# EAGLE board tvbgone-adj (EAGLE 5.10)
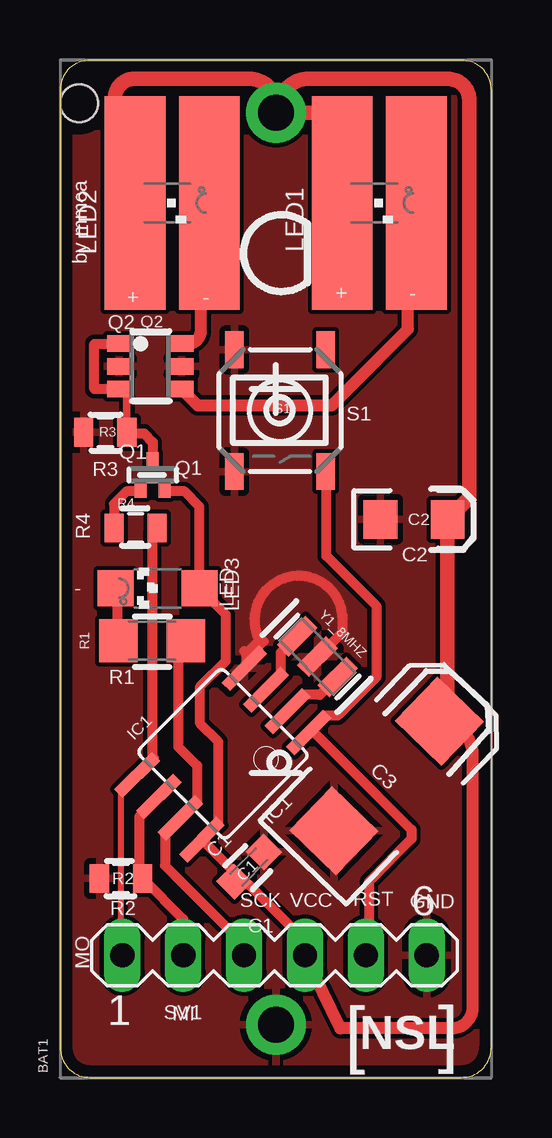
[diagram p0: board, top side]
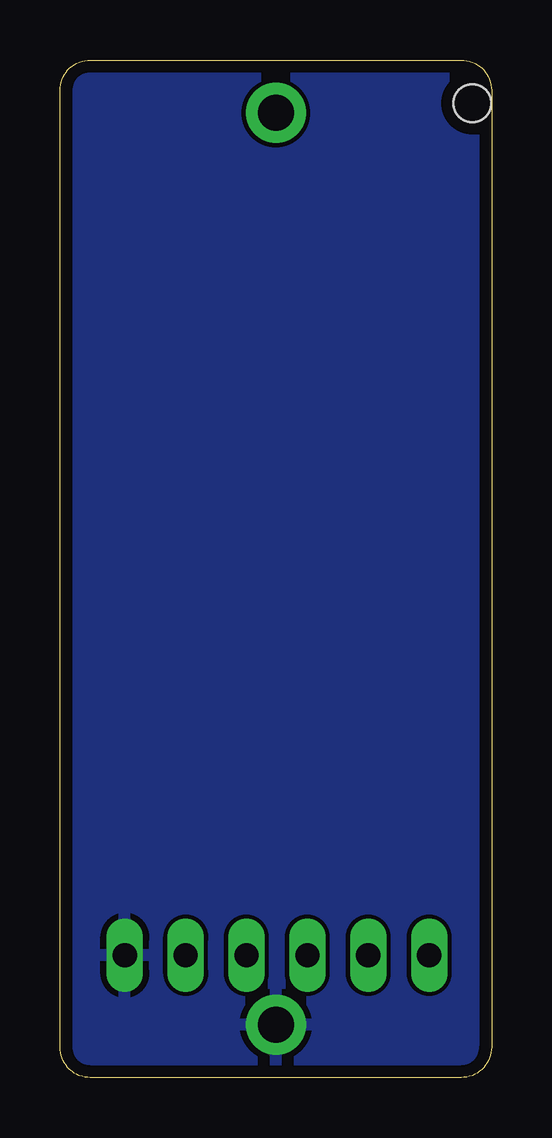
[diagram p1: board, bottom side, seen from below]

Size 18 x 42.4 mm. Coordinates in mm from the lower left corner, seen from the top.
Outline: 16.73,0 arc90 18,1.27 18,41.13 arc90 16.73,42.4 1.27,42.4 arc90 0,41.13 0,1.27 arc90 1.27,0 16.73,0
Copper layers (1*16): Top 0.0356mm / dielectric 1.5011mm / Bottom 0.0356mm
Design rules "SilverCircuits": minimum track width 7mil, minimum drill 14mil, track to track 7mil, track to pad 7mil, pad to pad 7mil, via to via 7mil, smd to smd 0mil, copper to edge 20mil, drill to drill 8mil, minimum pad ring 10mil, minimum via ring 8mil, stop-mask expansion 4mil, vias tented up to drill 0mil, thermal gap 10mil

## Footprints (pad centres in the part's own frame; a part is rotated, then mirrored left to right if it is on the bottom)
BATTERY_CR123A = drill 1.5 pad 2.5 round: + 19,0; - -19,0 | hole 1.575: 19.4,8.2
C0603K = smd 1.05 x 1.08: 1 -0.875,0; 2 0.875,0
EIA3216 = smd 1.4 x 1.6: A 1.4,0; C -1.4,0
EIA7343 = smd 2.55 x 2.7: A 3.17,0; C -3.17,0
SOIC8 = smd 0.5 x 2.2: 1 -1.905,-3.154; 2 -0.645,-3.154; 3 0.625,-3.154; 4 1.895,-3.154; 5 1.905,3.154; 6 0.635,3.154; 7 -0.635,3.154; 8 -1.905,3.154
SIDE_IR_NSL@1 = smd 2.54 x 8.89: A -1.547,0; C 1.547,0
CHIPLED_1206 = smd 1.5 x 1.5: A 0,-1.75; C 0,1.75
SOT416 = smd 0.6 x 0.5: 1 -0.65,0; 2 0.65,-0.5; 3 0.65,0.5
SSOT6 = smd 0.69 x 0.99: 1 -0.95,-1.3; 2 0,-1.3; 3 0.95,-1.3; 4 0.95,1.3; 5 0,1.3; 6 -0.95,1.3
1206 = smd 1.6 x 1.8: 1 -1.4,0; 2 1.4,0
0805 = smd 0.8 x 1.2: 1 -0.9,0; 2 0.9,0
TACTILE_SWITCH_SMD = smd 1.524 x 0.762: 1 -2.54,1.905; 2 2.54,1.905; 3 -2.54,-1.905; 4 2.54,-1.905
CON-LSTB_MA06-1 = drill 1.016 long: 1 -6.35,0; 2 -3.81,0; 3 -1.27,0; 4 1.27,0; 5 3.81,0; 6 6.35,0
RESONATOR-SMD = smd 0.7 x 1.7: 1 -1.2,0; 2 0,0; 3 1.2,0

## Placement (x,y rotation side)
BAT1  CR123A  [BATTERY_CR123A]  9,21.2 90 top
C1  0.1uF  [C0603K]  7.88,8.78 45 top
C2  10uF  [EIA3216]  14.77,23.26 0 top
C3  100uF  [EIA7343]  13.62,12.56 46 top
IC1  ATTINY85V-10S  [SOIC8]  6.8,13.49 135 top
LED1  [SIDE_IR_NSL@1]  13.32,36.44 0 top
LED2  [SIDE_IR_NSL@1]  4.68,36.44 0 top
LED3  [CHIPLED_1206]  4.07,20.39 90 top
Q1  BC857AT115  [SOT416]  3.87,25.11 270 top
Q2  FMB2222A  [SSOT6]  3.77,29.63 270 top
R1  1.5K  [1206]  3.84,18.2 180 top
R2  10K  [0805]  2.55,8.3 0 top
R3  10K  [0805]  1.89,26.89 180 top
R4  1K  [0805]  3.16,22.9 0 top
S1  SWITCH  [TACTILE_SWITCH_SMD]  9.18,27.79 270 top
SV1  [CON-LSTB_MA06-1]  8.95,5.1 0 top
Y1_8MHZ  RESONATOR  [RESONATOR-SMD]  10.74,17.54 315 top

## Library data of the parts
BAT1 = tvbgone-adj
C1 = rcl-ez
C2 C3 R1-R4 S1 Y1_8MHZ = SparkFun
IC1 = avr
LED1 LED2 = tvbgone3
LED3 = minimidi
Q1 = zetex
Q2 = fairchild-semic
SV1 = NSL

## Nets
GND: BAT1.- C1.2 C2.C C3.C IC1.4 Q2.2 Q2.5 R2.1 R3.2 S1.3 S1.4 SV1.6 Y1_8MHZ.2
MISO: IC1.6 R2.2 SV1.2
MOSI: IC1.5 R4.2 SV1.1
N$1: IC1.3 Y1_8MHZ.1
N$2: IC1.2 Y1_8MHZ.3
N$3: LED3.C R1.2
N$4: LED1.C Q2.4
N$5: LED2.C Q2.6
N$6: Q1.2 R4.1
N$7: Q1.1 Q2.1 Q2.3 R3.1
RST: IC1.1 S1.2 SV1.5
SCK: IC1.7 R1.1 SV1.3
VCC: BAT1.+ C1.1 C2.A C3.A IC1.8 LED1.A LED2.A LED3.A Q1.3 SV1.4

## Tracks (layer width: path | path; a pad name or v marks a point on that pad's centre or on a via)
GND
  Top 0.254: IC1.4 7.69,17.58 7.85,17.58 7.86,17.59 | Y1_8MHZ.2 10.75,17.54
  Top 0.305: 7.86,17.59 7.86,17.29 | 7.86,17.77 7.68,17.77 | 8.31,18.23 8.47,18.23 8.49,18.2 8.49,18.18
  Top 0.406: 7.68,17.77 7.86,17.59 | 7.86,17.77 8.31,18.23 arc-207 11.79,19.07 11.79,18.58 10.75,17.54 | 8.49,18.18 8.19,17.87
  pour Top: -0.04,42.28 18.22,42.28 18.22,0.12 -0.04,-0.09
  pour Bottom: -0.73,43.12 19.08,43.12 18.98,-0.44 -0.4,-0.77
MISO
  Top 0.406: SV1.2 5.14,6.61 R2.2 3.31,8.43 3.31,10.89 3.39,10.96 3.42,10.96 IC1.6
MOSI
  Top 0.254: SV1.1 2.6,6.52 2.52,6.6 2.52,11.91 IC1.5
  Top 0.406: IC1.5 3.92,13.33 arc-90 3.84,13.4 3.84,22.69 R4.2
N$1
  Top 0.406: IC1.3 9.2,16.78 9.2,17.7 Y1_8MHZ.1
N$2
  Top 0.406: IC1.2 9.49,15.31 10.12,15.94 10.84,15.94 Y1_8MHZ.3
N$3
  Top 0.305: LED3.C 2.39,20.32
  Top 0.406: 2.39,20.32 2.39,18.2 R1.2
N$4
  Top 0.508: 14.51,36.09 14.51,31.18 11.34,28.01 5.74,28.01 Q2.4
  Top 0.61: 14.51,36.09 LED1.C
N$5
  Top 0.406: 5.34,35.55 5.71,35.92 LED2.C | Q2.6 5.34,30.58
  Top 0.508: 5.34,30.58 arc90 5.88,31.12 5.88,32.3
  Top 0.61: 5.88,32.3 arc-90 5.71,32.47 5.71,35.92
N$6
  Top 0.406: R4.1 2.26,23.91 2.78,24.43 3.33,24.43 Q1.2
N$7
  Top 0.305: R3.1 2.79,28.68 Q2.3
  Top 0.406: Q2.1 1.43,30.57 1.43,28.68 Q2.3 | Q1.1 3.87,26.48 3.51,26.84 2.84,26.84 R3.1
RST
  Top 0.254: IC1.1 11.08,15.08
  Top 0.406: S1.2 11.11,25.22 11.11,21.73 13.19,19.65 13.19,16.68 11.59,15.08 11.08,15.08 11.03,15.08 10.6,14.65 10.6,14.39 14.66,10.33 14.66,9.95 12.89,8.17 12.89,5.22 SV1.5
SCK
  Top 0.254: 5.04,10.81 IC1.7 | R1.1 4.94,17.9
  Top 0.305: IC1.7 4.38,10.12
  Top 0.406: SV1.3 7.68,5.53 4.38,8.83 4.38,10.12 | 5.04,10.81 5.72,11.5 5.72,13 4.94,13.78 4.94,17.9
VCC
  Top 0.254: IC1.8 5.95,9.92
  Top 0.406: BAT1.+ 9,40.45 9.05,40.45 | 2.29,39.23 arc-90 3.14,38.39 LED2.A | 5.95,9.92 6.61,10.58 6.61,13.99 5.85,14.75 5.85,16.3 6.92,17.36 6.92,19.29 LED3.A 5.82,23.79 5.19,24.43 4.41,24.43 Q1.3 | 10.22,5.36 10.22,5.71 7.88,8.04 7.39,8.04 C1.1 7.26,8.57 IC1.8
  Top 0.508: 10.22,5.36 SV1.4 11.69,2.05 16.34,2.05 arc90 17.2,2.91 17.2,13.47 arc90 C3.A
  Top 0.61: 9.05,40.45 arc90 7.88,41.62 3.11,41.62 arc90 2.29,40.81 2.29,39.23 | LED1.A 11.77,40.25 11.77,40.2 BAT1.+ arc-90 10.42,41.62 16.16,41.62 arc-90 17.08,40.71 17.08,24.17 C2.A 16.17,15.19 C3.A 16.35,14.84

## Text on the board
_tsilk: by mmca | + | - | + | - | Q2 | S1 | R3 | Q1 | R4 | C2 | - | LED | R1 | IC1 | C1 | R2 | SCK | VCC | RST | GND | C1 | MO | MI | [ | NSL | ]